# EAGLE board iomodul2 (EAGLE 6.6.0)
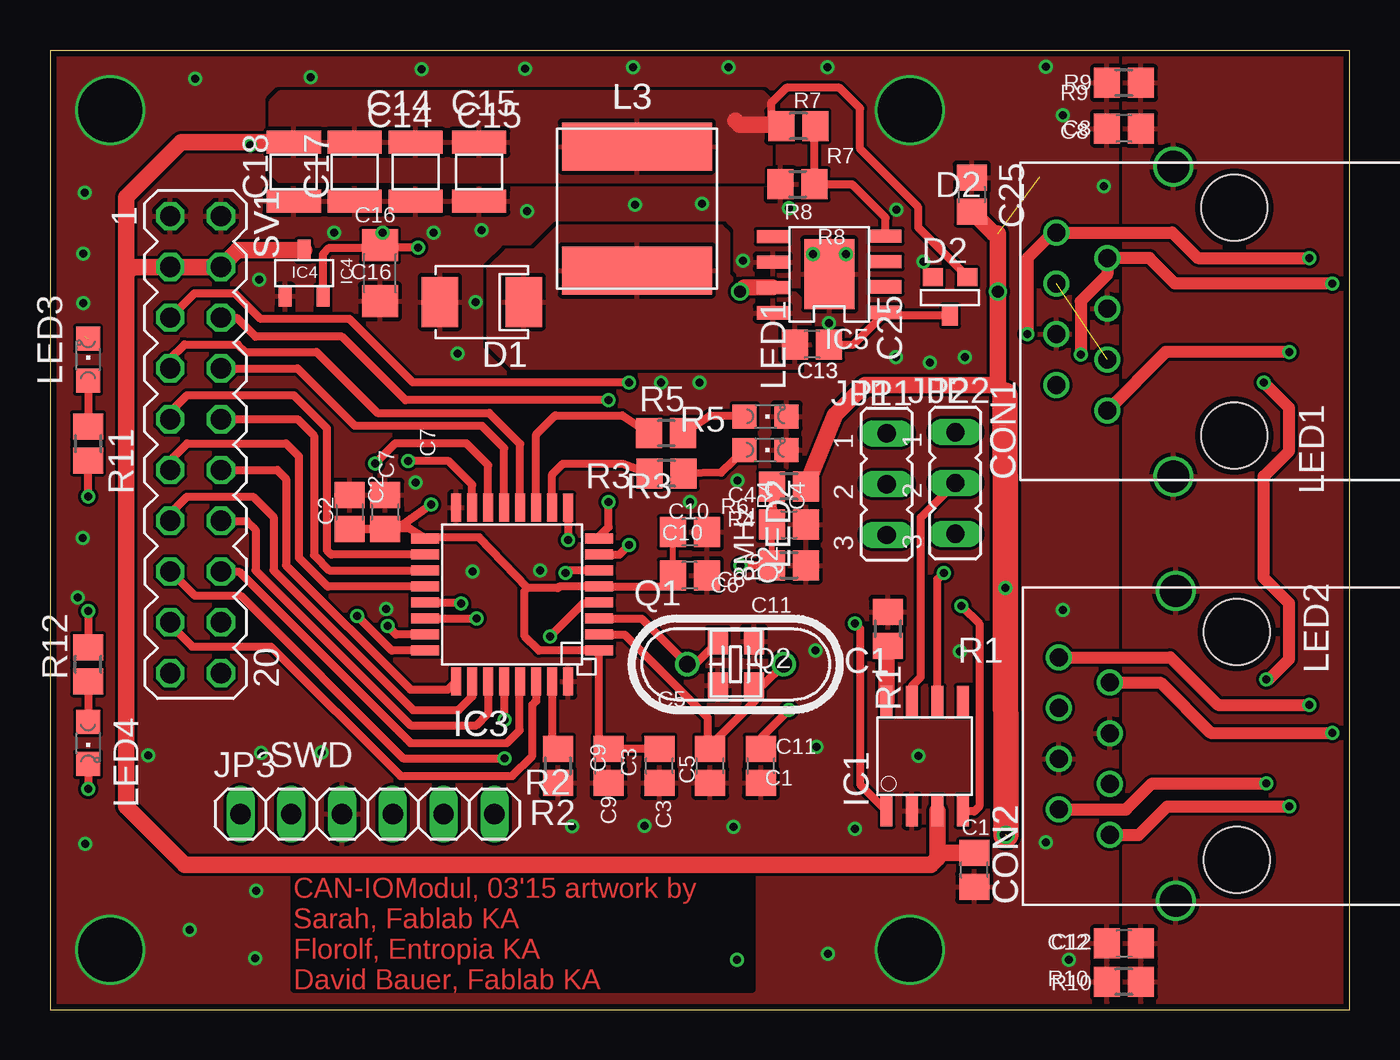
[diagram p0: board, top side]
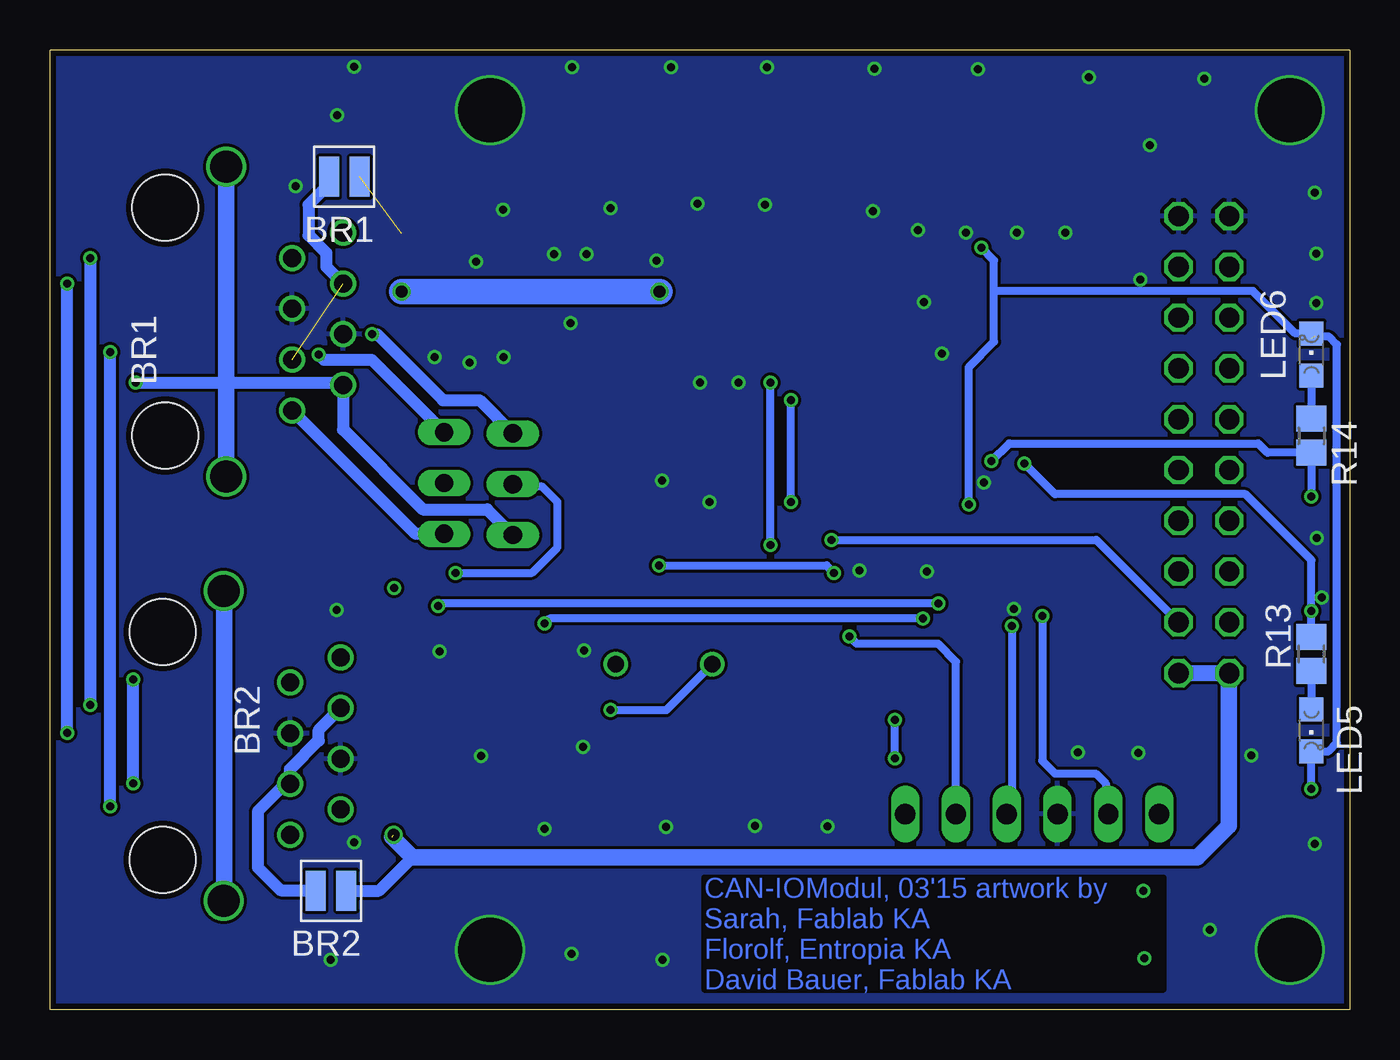
[diagram p1: board, bottom side, seen from below]

Size 65 x 48 mm. Coordinates in mm from the lower left corner, seen from the top.
Outline: 0,0 65,0 65,48 0,48 0,0
Copper layers (1*16): Top 0.035mm / dielectric 1.5mm / Bottom 0.035mm
Design rules "PCB-POOL Standard": minimum track width 0.15mm, minimum drill 0.3mm, track to track 0.15mm, track to pad 0.15mm, pad to pad 0.15mm, via to via 0.15mm, smd to smd 0.15mm, copper to edge 0.3mm, drill to drill 0.2mm, minimum pad ring 0.2mm, minimum via ring 0.15mm, stop-mask expansion 0.075mm, vias tented up to drill 0mil, thermal gap 0.2mm

## Footprints (pad centres in the part's own frame; a part is rotated, then mirrored left to right if it is on the bottom)
LÖTBRÜCKE = smd 1 x 2: 1 -0.77,0; 2 0.77,0
C0805 = smd 1.3 x 1.5: 1 -0.85,0; 2 0.85,0
1210 = smd 1.143 x 2.718: 1 -1.473,0; 2 1.473,0
C1206 = smd 1.6 x 1.8: 1 -1.4,0; 2 1.4,0
MEBP = drill 0.9: 1 -4.445,6.35; 2 -3.175,8.89; 3 -1.9,6.35; 4 -0.635,8.89; 5 0.635,6.35; 6 1.9,8.89; 7 3.175,6.35; 8 4.445,8.89 | drill 1.6: T1 -7.75,3.05; T2 7.75,3.05 | hole 3.3: -5.7,0; 5.7,0
SMB = smd 1.8 x 2.5: A 4.4,0; K 0.2,0
SOT23/32 = smd 1 x 0.9: 1 1.431,1.456; 2 -0.3,1.456 | smd 0.8 x 1: 3 0.565,-0.476
SO-8 = smd 0.61 x 1.524: 1 0,-0.203; 2 1.27,-0.203; 3 2.54,-0.203; 4 3.81,-0.203; 5 3.81,5.283; 6 2.54,5.283; 7 1.27,5.283; 8 0,5.283
LQFP32 = smd 1.4 x 0.5: 1 -4.35,2.8; 2 -4.35,2; 3 -4.35,1.2; 4 -4.35,0.4; 5 -4.35,-0.4; 6 -4.35,-1.2; 7 -4.35,-2; 8 -4.35,-2.8; 17 4.35,-2.8; 18 4.35,-2; 19 4.35,-1.2; 20 4.35,-0.4; 21 4.35,0.4; 22 4.35,1.2; 23 4.35,2; 24 4.35,2.8 | smd 0.5 x 1.4: 9 -2.8,-4.35; 10 -2,-4.35; 11 -1.2,-4.35; 12 -0.4,-4.35; 13 0.4,-4.35; 14 1.2,-4.35; 15 2,-4.35; 16 2.8,-4.35; 25 2.8,4.35; 26 2,4.35; 27 1.2,4.35; 28 0.4,4.35; 29 -0.4,4.35; 30 -1.2,4.35; 31 -2,4.35; 32 -2.8,4.35
SOT23 = smd 0.65 x 1.05: 1 -0.95,-1.15; 2 0.95,-1.15; 3 0,1.15
SO8-POWERPAD = smd 0.66 x 1.6: 1 -1.905,-2.819; 2 -0.635,-2.819; 3 0.635,-2.819; 4 1.905,-2.819; 5 1.88,2.819; 6 0.61,2.819; 7 -0.66,2.819; 8 -1.93,2.819 | smd 3.5 x 2.5: TP 0,0
JP2 = drill 0.914 long: 1 -2.54,0; 2 0,0; 3 2.54,0
1X06 = drill 1.016 long: 1 -6.35,0; 2 -3.81,0; 3 -1.27,0; 4 1.27,0; 5 3.81,0; 6 6.35,0
WE-LQS = smd 2.4 x 7.5: P$1 3.1,0; P$2 -3.1,0
CHIPLED_0805 = smd 1.2 x 1.2: A 0,-1.05; C 0,1.05
HC49U-V = drill 0.813: 1 -2.413,0; 2 2.413,0
MT-CRYSTAL = smd 1.3 x 1: P$1 0,0; P$2 2.2,0; P$3 2.2,1.8; P$4 0,1.8
R0805 = smd 1.3 x 1.5: 1 -0.85,0; 2 0.85,0
MA10-2 = drill 1.016 octagon: 1 -11.43,-1.27; 2 -11.43,1.27; 3 -8.89,-1.27; 4 -8.89,1.27; 5 -6.35,-1.27; 6 -6.35,1.27; 7 -3.81,-1.27; 8 -3.81,1.27; 9 -1.27,-1.27; 10 -1.27,1.27; 11 1.27,-1.27; 12 1.27,1.27; 13 3.81,-1.27; 14 3.81,1.27; 15 6.35,-1.27; 16 6.35,1.27; 17 8.89,-1.27; 18 8.89,1.27; 19 11.43,-1.27; 20 11.43,1.27

## Placement (x,y rotation side)
BR1  LÖTBRÜCKE-S  [LÖTBRÜCKE]  50.28,41.65 180 bottom
BR2  LÖTBRÜCKE-S  [LÖTBRÜCKE]  50.95,5.94 180 bottom
C1  100n  [C0805]  46.23,6.99 90 top
C2  100n  [C0805]  14.99,24.89 270 top
C3  100n  [C0805]  30.48,12.19 90 top
C4  [C0805]  36.96,24.26 0 top
C5  12p  [C0805]  33.02,12.19 90 top
C6  10n  [C0805]  32,21.72 180 top
C7  4µ7 6,3V  [C0805]  16.76,24.89 270 top
C8  100n  [C0805]  53.72,44.07 180 top
C9  4µ7 6,3V  [C0805]  27.94,12.19 90 top
C10  1µ 6,3V  [C0805]  32,23.88 180 top
C11  12p  [C0805]  35.56,12.19 90 top
C12  100n  [C0805]  53.72,3.3 180 top
C13  10n  [C0805]  38.12,33.27 180 top
C14  22µ 6,3V  [1210]  18.29,41.91 90 top
C15  22µ 6,3V  [1210]  21.46,41.91 90 top
C16  1µ 6,3V  [C1206]  16.51,36.83 90 top
C17  22µ 6,3V  [1210]  15.24,41.91 90 top
C18  22µ 6,3V  [1210]  12.19,41.91 90 top
C25  10µ35V  [C0805]  46.1,40.77 270 top
CON1  [MEBP]  59.23,34.42 90 top
CON2  [MEBP]  59.35,13.18 90 top
D1  MBRS130T3  [SMB]  23.9,35.4 180 top
D2  BAT54  [SOT23/32]  44.45,35.18 0 top
IC1  MCP2551  [SO-8]  41.84,10.14 0 top
IC3  STM32F042K  [LQFP32]  23.12,20.76 180 top
IC4  MCP1700T3302E/TT  [SOT23]  12.7,36.83 0 top
IC5  DS8289  [SO8-POWERPAD]  38.98,36.78 90 top
JP1  [JP2]  41.86,26.28 270 top
JP2  [JP2]  45.29,26.34 270 top
JP3  [1X06]  15.88,9.78 0 top
L3  74404084470 / 47µ  [WE-LQS]  29.35,40.07 270 top
LED1  [CHIPLED_0805]  35.79,29.67 270 top
LED2  [CHIPLED_0805]  35.79,28 270 top
LED3  [CHIPLED_0805]  1.91,32.51 0 top
LED4  [CHIPLED_0805]  1.91,13.34 180 top
LED5  [CHIPLED_0805]  1.91,13.97 180 bottom
LED6  [CHIPLED_0805]  1.91,32.77 0 bottom
Q1  [HC49U-V]  34.29,17.27 0 top
Q2  8MHz  [MT-CRYSTAL]  33.4,18.41 270 top
R1  10k  [R0805]  41.91,19.05 90 top
R2  10k  [R0805]  25.4,12.19 270 top
R3  68  [R0805]  30.84,26.82 180 top
R4  [R0805]  36.96,26.16 180 top
R5  68  [R0805]  30.82,28.83 180 top
R6  [R0805]  36.96,22.23 0 top
R7  68k 1%  [R0805]  37.43,44.19 180 top
R8  22k 1%  [R0805]  37.4,41.28 0 top
R9  [R0805]  53.72,46.35 180 top
R10  [R0805]  53.72,1.4 180 top
R11  68  [R0805]  1.91,28.32 270 top
R12  68  [R0805]  1.91,17.27 90 top
R13  68  [R0805]  1.91,17.78 90 bottom
R14  68  [R0805]  1.91,28.7 270 bottom
SV1  [MA10-2]  7.28,28.26 270 top

## Library data of the parts
BR1 BR2 = myspecial
C1-C13 C16 C25 R1-R14 = schlager_passiv
C14 C15 C17 C18 Q2 = MYPASS
CON1 CON2 = myconn
D1 D2 = MYDISCR
IC1 IC4 = MYMCHIP
IC3 = MYSGS
IC5 = MYRichtek
JP1 JP2 = jumper
JP3 = pinhead
L3 = myinductiv
LED1-LED6 = led
Q1 = crystal; OC_FARNELL: 1666969; OC_NEWARK: unknown
SV1 = con-lstb; OC_FARNELL: unknown; OC_NEWARK: unknown

## Nets
+3V3: C2.2 C3.2 C6.2 C7.2 C9.2 C10.2 C16.2 IC3.1 IC3.5 IC3.17 IC4.2 LED3.C LED4.C LED5.C LED6.C
+5V: C1.2 C14.2 C15.2 C17.2 C18.2 D2.1 IC1.3 IC4.3 L3.P$2 R7.2 SV1.3 SV1.4
+24V: BR1.1 BR2.1 C25.2 IC5.7 R4.1 SV1.19 SV1.20
CANH: IC1.7 JP2.2
CANH1: CON1.1 CON2.1 JP2.3
CANH2: CON1.7 CON2.7 JP2.1
CANL: IC1.6 JP1.2
CANL1: CON1.2 CON2.2 JP1.3
CANL2: CON1.8 CON2.8 JP1.1
CANRX: IC1.4 IC3.21
CANTX: IC1.1 IC3.22
GND: C1.1 C2.1 C3.1 C4.2 C5.1 C6.1 C7.1 C8.2 C9.1 C10.1 C11.1 C12.2 C14.1 C15.1 C16.1 C17.1 C18.1 C25.1 CON1.4 CON1.5 CON2.4 CON2.5 D1.A IC1.2 IC3.16 IC3.32 IC4.1 IC5.6 IC5.TP JP3.3 LED1.C LED2.C Q2.P$2 Q2.P$4 R1.2 R2.2 R6.2 R8.1 R9.2 R10.2 SV1.1 SV1.2
LED1: IC3.11 R5.2
LED2: IC3.10 R3.2
LED3_: IC3.14 R12.2 R13.2
LED4_: IC3.15 R11.2 R14.2
N$1: IC1.8 R1.1
N$2: BR1.2 CON1.3 CON1.6
N$3: LED2.A R3.1
N$4: C11.2 IC3.3 Q1.1 Q2.P$1
N$5: C5.2 IC3.2 Q1.2 Q2.P$3
N$6: BR2.2 CON2.3 CON2.6
N$7: LED1.A R5.1
N$8: LED5.A R13.1
N$9: LED6.A R14.1
N$10: LED4.A R12.1
N$11: LED3.A R11.1
N$12: C13.1 D2.3 IC5.1
N$13: C13.2 D1.K IC5.8 L3.P$1
N$15: IC3.31 R2.1
N$18: IC5.4 R7.1 R8.2
NRST: IC3.4 JP3.5
PA1: IC3.7 SV1.5
PA2: IC3.8 SV1.6
PA3: IC3.9 SV1.18
PA6: IC3.12 SV1.7
PA7: IC3.13 SV1.8
PA8: IC3.18 SV1.9
PA9: IC3.19 SV1.10
PA10: IC3.20 SV1.11
PA15: IC3.25 SV1.12
PB3: IC3.26 SV1.13
PB4: IC3.27 SV1.14
PB5: IC3.28 SV1.15
PB6: IC3.29 SV1.16
PB7: IC3.30 SV1.17
PE: C8.1 C12.1 CON1.T1 CON1.T2 CON2.T1 CON2.T2 R9.1 R10.1
SWCLK: IC3.24 JP3.2
SWDIO: IC3.23 JP3.4
SWO: JP3.6
UIN: C4.1 IC3.6 R4.2 R6.1
VDD_TARGET: JP3.1

## Tracks (layer width: path | path; a pad name or v marks a point on that pad's centre or on a via)
+3V3  (via drill 0.4)  (1 unrouted)
  Top 0.3: C6.2 C10.2
  Top 0.4: C3.2 C9.2 | 27.44,17.93 IC3.1
  Top 0.406: C2.2 C7.2 17.97,24.07 IC3.17 18.83,23.62 21.46,23.62 23.88,21.08 | 14.99,24.13 C2.2 | IC4.2 13.65,37.78 13.97,38.1 16.38,38.1 C16.2 16.64,38.1 v18.41,38.1 | 27.44,17.93 27.44,13.58 C9.2 | C6.2 30.53,21.16 IC3.5 25.48,21.16 25.4,21.08 23.88,21.08 | 26.62,17.96 IC3.1 24.46,17.96 23.75,18.67 23.75,20.95 23.88,21.08 | C2.2 17.27,24 v19.05,25.27 | LED4.C v1.91,11.05
  Bottom 0.406: v19.05,25.27 19.05,32.13 17.78,33.4 17.78,36.07 | 17.78,36.07 17.78,37.47 v18.41,38.1 | v1.91,11.05 LED5.C 1.05,12.92 0.64,13.34 0.64,33.27 1.02,33.66 1.74,33.66 LED6.C 2.7,33.82 4.83,35.94 17.65,35.94 17.78,36.07
+5V
  Top 0.406: 44.45,9.87 IC1.3 | D2.1 45.88,36.67 43.43,39.12 43.43,40.13 40.51,43.05 40.51,45.09 39.5,46.1 36.83,46.1 36.07,45.34 36.07,44.26 R7.2
  Top 0.813: C18.2 6.55,43.38 3.81,40.64 3.81,36.83 | 3.81,36.83 4.13,37.15 SV1.3 SV1.4 9.38,37.98 IC4.3 | 3.81,36.83 3.81,10.16 6.73,7.24 44.07,7.24 44.38,7.55 44.38,7.62 | IC1.3 44.38,7.62 | C1.2 44.6,7.83 44.38,7.62 | 36.07,44.26 34.48,44.26 34.29,44.45
  pour Top (rank 3): 17.08,41.46 35.69,41.46 36.05,41.82 36.05,45.45 35.65,45.85 11.51,45.85 11.04,45.38 11.04,41.9 11.46,41.48 11.98,41.48
+24V  (via drill 0.4, 0.6)  (2 unrouted)
  Top 0.3: 47.62,22.67 47.79,22.84 | 47.8,21.69 47.8,22.06 47.79,22.06 | v47.8,21.08 47.8,20.57
  Top 0.6: 47.78,15.05 v47.81,8.73
  Top 0.8: IC5.7 34.72,36.12 v34.51,35.91
  Top 0.813: R4.1 39.27,29.74 40.77,31.24 47.25,31.24 47.42,31.07 | 47.42,31.07 v47.42,35.91 47.42,38.81 47.2,38.81 C25.2 | 47.42,31.07 47.76,30.73
  Top 1.27: v47.81,8.73 v47.8,21.08 47.8,21.69 47.79,22.84 47.76,30.73
  Bottom 0.3: 47.77,21.05 v47.8,21.08
  Bottom 0.61: BR2.1 48.54,5.94 46.86,7.62
  Bottom 0.8: SV1.20 SV1.19
  Bottom 0.813: 47.88,8.64 46.86,7.62 7.62,7.62 6.04,9.2 6.04,16.8 SV1.19
  Bottom 1.27: v47.42,35.91 v34.51,35.91 34.49,35.91
CANH
  Top 0.406: IC1.7 43.12,16.19 43.56,16.64 43.56,24.61 JP2.2
CANH1  (via drill 0.4)
  Top 0.61: CON2.1 54.45,8.73 55.88,10.16 v61.98,10.16 | v61.98,32.89 55.8,32.89 CON1.1
  Bottom 0.61: JP2.3 46.7,23.8 CON1.1 | v61.98,10.16 v61.98,32.89
CANH2  (via drill 0.4)
  Top 0.61: CON2.7 55.53,16.36 58.04,13.84 v64.14,13.84 | v64.14,36.32 56.26,36.32 54.99,37.59 CON1.7 52.88,36.75 51.56,35.43 v51.56,32.77
  Bottom 0.61: v64.14,13.84 v64.14,36.32 | v51.56,32.77 51.31,32.51 48.92,32.51 JP2.1
CANL  (via drill 0.4)
  Top 0.406: IC1.6 44.38,21.52 v44.7,21.84
  Bottom 0.406: v44.7,21.84 40.89,21.84 39.62,23.11 39.62,25.4 40.39,26.16 41.74,26.16 JP1.2
CANL1  (via drill 0.4)
  Top 0.61: CON2.2 53.82,10.01 55.12,11.3 v60.83,11.3 | v60.83,16.51 60.96,16.51 61.98,17.53 61.98,20.32 60.71,21.59 60.71,26.67 61.98,27.94 61.98,30.1 v60.71,31.37
  Bottom 0.61: JP1.3 43.13,25.02 46.35,25.02 50.34,29 CON1.2 50.46,31.37 v60.71,31.37 | v60.83,11.3 v60.83,16.51
CANL2  (via drill 0.4)
  Top 0.61: v62.99,37.59 57.4,37.59 56.13,38.87 CON1.8 50.17,38.87 48.9,37.59 v48.9,33.78 | CON2.8 56.03,17.62 58.42,15.24 v62.99,15.24
  Bottom 0.61: v62.99,37.59 v62.99,15.24 | v48.9,33.78 48.64,33.78 45.34,30.48 43.52,30.48 JP1.1
CANRX  (via drill 0.4)
  Top 0.406: IC3.21 20.53,20.36 v20.57,20.32 | v45.59,20.19 46.48,19.3 46.48,10.16 46.23,9.91 45.68,9.91 IC1.4
  Bottom 0.406: v20.57,20.32 45.47,20.32 v45.59,20.19
CANTX  (via drill 0.4)
  Top 0.406: IC3.22 v21.33,19.56 v21.34,19.56 | v40.26,19.3 40.51,19.05 40.51,11.27 IC1.1
  Bottom 0.406: v21.34,19.56 40.01,19.56 v40.26,19.3
GND  (via drill 0.4, 3.2)
  other vias: 7.27,46.56 10,43.23 13.03,46.64 18.59,47.05 23.77,47.06 29.15,47.14 50.65,44.73 52.7,41.19 45.5,17.9 40.25,9.05 49.8,8.37 50.97,2.48 43.45,12.68 34.37,2.5 38.91,2.78 26.12,9.17 10.25,2.56 10.32,5.95 38.33,13.14 13.58,12.87 1.75,8.3 1.39,20.6 10.56,12.85 4.91,12.71 1.64,23.59 1.67,37.81 1.67,35.34 1.74,40.85 16.64,38.86 19.18,38.86 21.59,38.99 23.85,39.93 32.61,40.32 43.68,37.42 21.29,35.4 20.4,32.82 32.48,31.37 14.22,38.86 10.46,36.52 42.31,32.64 44.01,32.37 45.76,32.64 36.97,40.08 18.28,26.36 3,3 3,45 43,3 33.94,47.13 38.89,47.13 50.66,20 49.8,47.17 6.98,3.98 30.55,31.36 29.25,40.26 42.33,40.02 29.74,9.2 38.29,17.97 16.8,20.05 24.51,21.95 21.13,21.91 43,45 34.19,9.13 34.39,26.45 32.02,25.39 38.16,37.79 39.8,37.78 38.96,34.35 34.66,37.46
  pour Top (rank 5): -0.01,47.96 53.11,47.96 53.66,47.35 53.75,0.76 53.05,0.05 0.03,0.05 0.02,7.33 0.03,46.33
  pour Bottom (rank 3): 0,48 64.95,48 65.02,0 0.07,0
LED1
  Top 0.406: IC3.11 24.32,28.77 25.27,29.72 28.64,29.72 R5.2
LED2
  Top 0.406: IC3.10 25.12,26.77 25.65,27.3 28.63,27.3 R3.2
LED3_  (via drill 0.4)
  Top 0.406: v1.91,19.94 R12.2 | IC3.14 21.92,27.23 20.83,28.32 17.27,28.32 v16.26,27.3
  Bottom 0.406: v1.91,19.94 R13.2 1.91,22.48 5.21,25.78 14.73,25.78 v16.26,27.3
LED4_  (via drill 0.4)
  Top 0.406: IC3.15 21.12,26.25 19.94,27.43 v17.91,27.43 | v1.91,25.65 R11.2
  Bottom 0.406: v1.91,25.65 R14.2 4.1,27.85 4.57,28.32 17.02,28.32 v17.91,27.43
N$1
  Top 0.813: IC1.8 41.84,18.14 R1.1
N$2  (1 unrouted)
  Bottom 0.61: BR1.2 51.05,41.28 52.07,40.26 52.07,38.73 51.18,37.85 51.18,37.16 CON1.6
N$3
  Top 0.406: LED2.A 33.57,26.85 R3.1
N$4  (via drill 0.4)
  Top 0.406: IC3.3 29.59,19.56 Q1.1 32.26,17.27 Q2.P$1 | C11.2 35.56,13.59 v36.96,14.99
  Bottom 0.406: v36.96,14.99 34.16,14.99 Q1.1
N$5
  Top 0.406: Q1.2 35.65,16.21 Q2.P$3 35.31,16.11 35.31,15.49 33.4,13.59 C5.2 32.89,13.72 32.89,14.61 28.74,18.76 IC3.2
N$6
  Bottom 0.61: BR2.2 51.74,5.97 53.47,5.97 54.61,7.11 54.61,9.91 53.24,11.28 CON2.3 53,12.02 51.56,13.46 51.56,13.98 CON2.6
N$7
  Top 0.406: R5.1 33.02,29.71 34.8,29.72 34.87,29.72 LED1.A
N$8
  Bottom 0.406: R13.1 LED5.A
N$9
  Bottom 0.406: LED6.A R14.1
N$10
  Top 0.406: R12.1 LED4.A
N$11
  Top 0.406: LED3.A R11.1
N$12
  Top 0.4: C13.1 40.19,33.27 IC5.1
  Top 0.406: D2.3 41.97,34.7 IC5.1
N$13
  pour Top (rank 4): 25.47,39.17 33.57,39.17 33.88,38.86 33.88,36.74 34.65,35.97 37.12,35.97 37.93,35.16 37.98,32.65 37.44,32.11 23.16,32.08 21.97,33.27 21.97,37.08 22.86,37.97 24.27,37.97
N$15
  Top 0.406: IC3.31 25.12,13.51 R2.1
N$18
  Top 0.406: IC5.4 41.8,39.61 40.13,41.27 38.83,41.27 R8.2 38.25,44.16 R7.1
NRST  (via drill 0.4)
  Top 0.406: IC3.4 27.43,20.32 26.67,20.32 v25.02,18.67
  Bottom 0.406: JP3.5 19.68,17.4 20.57,18.29 24.64,18.29 v25.02,18.67
PA1  (via drill 0.4)
  Top 0.3: IC3.7
  Top 0.406: IC3.7 28.48,22.76 v28.96,23.24 | v28.96,31.37 18.16,31.37 14.99,34.54 10.54,34.54 9.27,35.81 7.21,35.81 SV1.5
  Bottom 0.406: v28.96,23.24 v28.96,31.37
PA2  (via drill 0.4)
  Top 0.406: IC3.8 27.47,23.66 27.94,24.13 v27.94,25.4 | v27.94,30.48 17.78,30.48 14.61,33.66 10.29,33.66 9.33,34.61 SV1.6
  Bottom 0.406: v27.94,25.4 v27.94,30.48
PA3  (via drill 0.4)
  Top 0.406: IC3.9 v25.92,23.51 v25.91,23.5
  Bottom 0.406: v25.91,23.5 12.68,23.5 SV1.18
PA6
  Top 0.406: SV1.7 6.01,32.55 6.73,33.27 9.4,33.27 9.78,32.89 13.34,32.89 16.38,29.84 21.97,29.84 23.52,28.3 IC3.12
PA7
  Top 0.406: SV1.8 12.38,32.07 15.24,29.21 21.59,29.21 22.72,28.08 IC3.13
PA8
  Top 0.406: SV1.9 6.01,29.89 6.86,30.73 12.19,30.73 13.84,29.08 13.84,22.99 14.07,22.76 IC3.18
PA9
  Top 0.406: SV1.10 12.38,29.53 13.21,28.7 13.21,22.73 13.97,21.97 IC3.19
PA10
  Top 0.406: SV1.11 6.01,27.47 6.86,28.32 11.81,28.32 12.45,27.69 12.45,22.61 13.89,21.16 IC3.20
PA15
  Top 0.406: SV1.12 11.36,26.99 11.81,26.54 11.81,22.23 18.03,16 19.91,16 IC3.25
PB3
  Top 0.406: SV1.13 6.01,24.81 6.86,25.65 10.16,25.65 11.18,24.64 11.18,21.97 18.16,14.99 20.45,14.99 21.12,15.66 IC3.26
PB4
  Top 0.406: SV1.14 9.84,24.45 10.29,24 10.29,21.97 18.03,14.22 21.34,14.22 21.92,14.81 IC3.27
PB5  (via drill 0.4)
  Top 0.406: SV1.15 6.03,21.91 7.24,20.7 9.53,20.7 17.65,12.57 v22.73,12.57 | v22.73,14.48 22.73,16.4 IC3.28
  Bottom 0.406: v22.73,12.57 v22.73,14.48
PB6
  Top 0.406: SV1.16 9.46,21.91 18.03,13.34 22.86,13.34 23.5,13.97 23.5,16.39 IC3.29
PB7
  Top 0.406: SV1.17 6.01,19.26 7.11,18.16 11.05,18.16 17.53,11.68 23.11,11.68 24.13,12.7 24.13,15.24 24.32,15.43 IC3.30
PE
  Bottom 0.813: CON1.T2 CON1.T1 | CON2.T2 CON2.T1
  pour Top (rank 4): 53.77,48 65,48 65,0 53.77,0
SWCLK  (via drill 0.4)
  Top 0.406: IC3.24 17.09,17.96 v15.37,19.68
  Bottom 0.406: v15.37,19.68 15.37,12.45 14.73,11.81 12.7,11.81 12.19,11.3 12.19,9.91 JP3.2
SWDIO  (via drill 0.4)
  Top 0.406: IC3.23 17.31,18.76 v16.89,19.18
  Bottom 0.406: v16.89,19.18 16.89,10.03 JP3.4
UIN  (via drill 0.4)
  Top 0.3: R6.1 C4.1
  Top 0.406: R4.2 36.17,24.79 C4.1 | R6.1 v34.54,22.23 | IC3.6 25.9,21.96 v25.78,21.84
  Bottom 0.406: v34.54,22.23 26.16,22.23 v25.78,21.84

## Text on the board
Top: CAN-IOModul, 03'15 artwork by / Sarah, Fablab KA / Florolf, Entropia KA / David Bauer, Fablab KA
Bottom: CAN-IOModul, 03'15 artwork by / Sarah, Fablab KA / Florolf, Entropia KA / David Bauer, Fablab KA
_tPlace: IC4
_tNames: R9 | L3 | C14 | C15 | C8 | R7 | SV1 | D2 | R8 | C16 | IC5 | D1 | C13 | C25 | R5 | JP1 | JP2 | C7 | C2 | R3 | CON1 | LED1 | R6 | R4 | C4 | C10 | C6 | C11 | R1 | Q2 | IC1 | LED2 | C5 | IC3 | SWD | C9 | C3 | R2 | C1 | CON2 | C12 | R10
_bNames: BR1 | BR2